# Altium PCB buck2.PcbDoc
Units mil, origin at the board's own origin, x right, y up, seen from the top; angles counter-clockwise.
Board outline 1968.5 x 787.4 mil, 2 copper layers (Top Layer, Bottom Layer); 20 components, 10 nets, 55 pads, 71 vias.
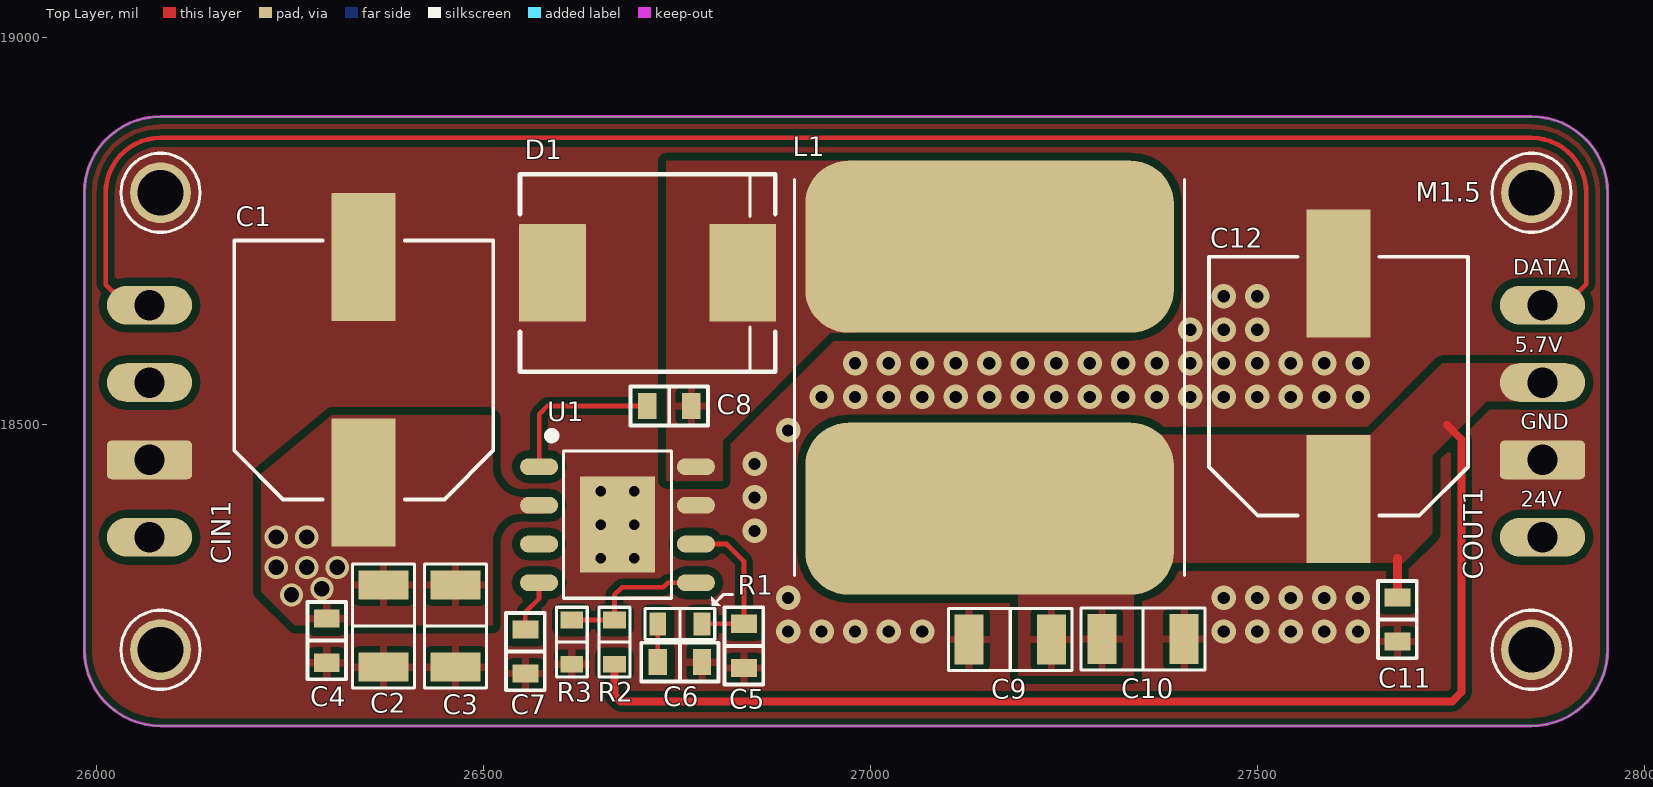
[diagram p0: Top Layer view]
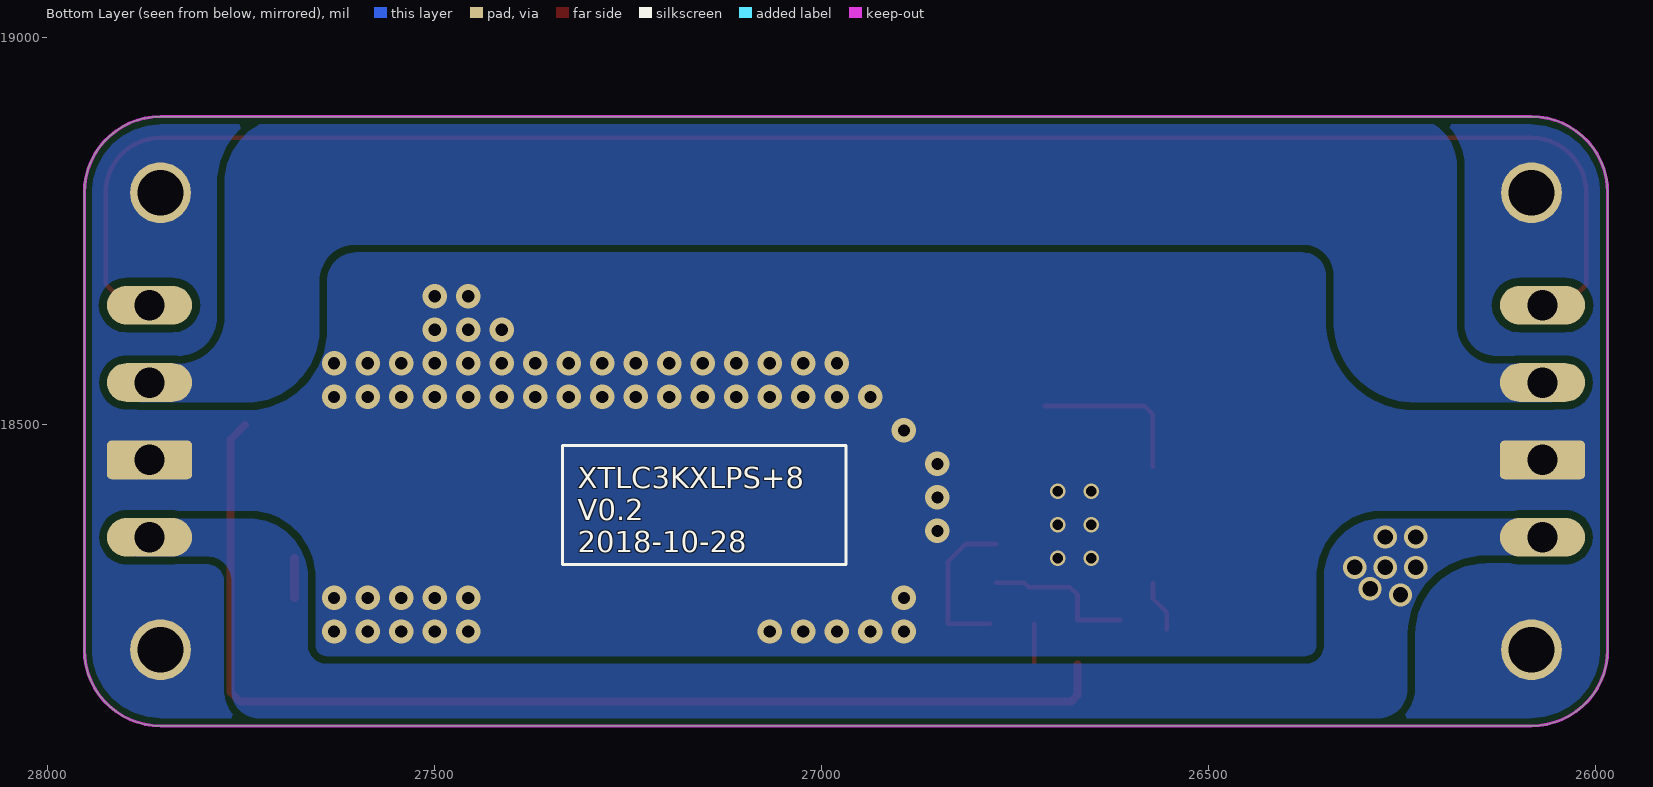
[diagram p1: Bottom Layer view, seen from below]
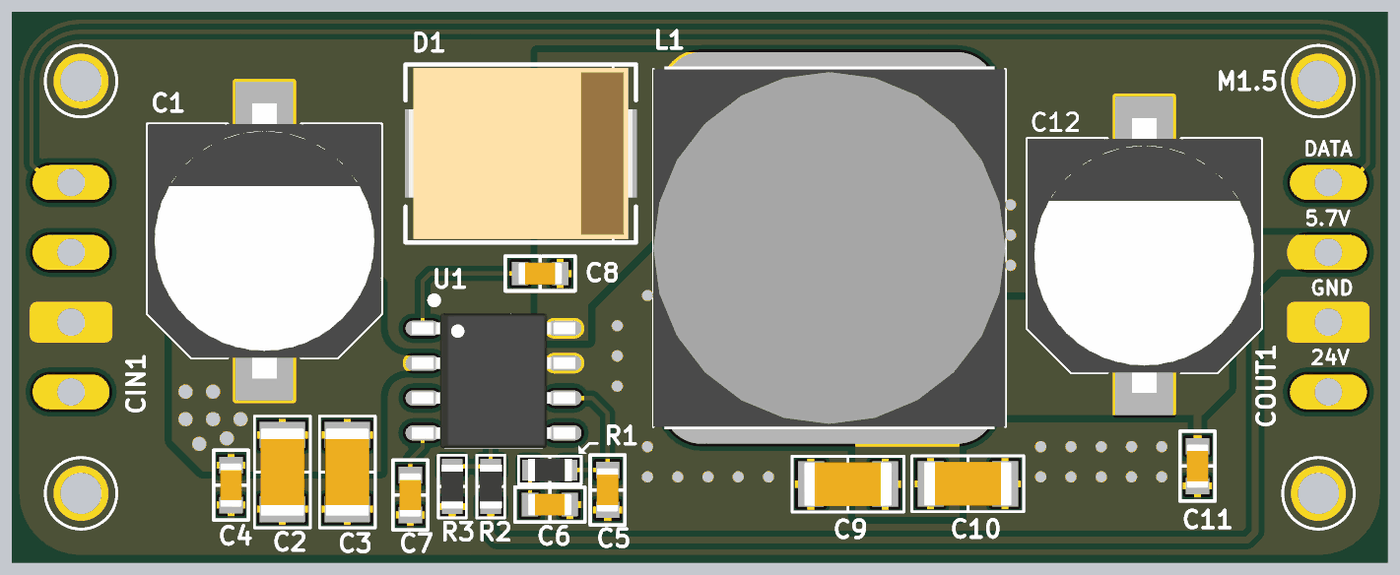
[diagram p2: 3D render of the assembled board from above, using the file's embedded part models]

## Layer stack, top to bottom
Top Solder: solder mask 0.4, Solder Resist, Dk 3.5
Top Layer: signal copper 1.4
Dielectric 1: dielectric 12.6, FR-4, Dk 4.8
Bottom Layer: signal copper 1.4
Bottom Solder: solder mask 0.4, Solder Resist, Dk 3.5

## Board outline
25984.26,18208.66 ccw(c26082.68,18208.66) 26082.69,18110.24 27854.34,18110.24 ccw(c27854.34,18208.66) 27952.76,18208.66 27952.76,18799.07 ccw(c27854.33,18799.21) 27854.33,18897.64 26082.69,18897.64 ccw(c26082.69,18799.21) 25984.26,18799.21

## Design rules (kind name [scope] priority, off if disabled: settings)
AssemblyTestPointUsage [All] p1: valid=2
Clearance [All vs InPadClass('Mounting')] p1: gap=10 except(1.97: THPad-Poly; 8: Arc-Poly Track-Poly)
Clearance Clearance_1 [All] p2: gap=10 except(8: Arc-Poly Track-Poly; 12: Via-Via)
ComponentClearance [All] p1: gap=0 collisioncheckmode=3 verticalgap=10 showdistances=FALSE
FabricationTestPointUsage [All] p1: valid=2 allowmultiple=FALSE
HoleSize [All] p1: absolutevalues=TRUE maxlimit=200 minlimit=1 maxpercent=80.000 minpercent=20.000
PlaneClearance [All] p1: clearance=8
PolygonConnect [All vs InPadClass('SpecialPad') OR (IsVia AND InNetClass('Power')) Or InPadClass('Mounting')] p1: connectstyle=Direct reliefconductorwidth=10 reliefentries=4 polygonreliefangle="90 Angle" airgapwidth=10
PolygonConnect PolygonConnect_1 [All] p2: connectstyle=Relief reliefconductorwidth=10 reliefentries=4 polygonreliefangle="90 Angle" airgapwidth=8
RoutingCorners [All] p1: cornerstyle=90-Degree minsetback=10 maxsetback=100
RoutingVias [All] p1: holewidth=28 width=25 viastyle="Through Hole" minholewidth=13.78 minwidth=13.78 maxholewidth=196.85 maxwidth=196.85
SMDNeckDown [All] p1: percent=50.000
SilkToSilkClearance [All] p1: silktosilkclearance=0
SilkToSolderMaskClearance [IsPad] p1: minsilkscreentomaskgap=0 clearancetoexposedcopper=TRUE
SolderMaskExpansion [All] p1: expansion=4
Width [All] p1: maxlimit=50 minlimit=6 preferedwidth=10
22 further rules are at their usual default settings.

## Classes and differential pairs
pad class Mounting: Free-1
component class Special: L1
pad class SpecialPad: C1-1 C1-2 C12-1 C12-2 CIN1-1 CIN1-2 CIN1-3 CIN1-4 COUT1-1 COUT1-2 COUT1-3 COUT1-4 D1-1 D1-2 L1-1 L1-2 U1-2 U1-7 U1-8 U1-9
net class Power: GND SW VIN VOUT

## Components (designator, comment, footprint, x,y, rotation, side; value= is the part's Value field where it differs from the comment)
C1 "Cap2" CAPAE10083X104N 26345.27,18570.24 r90 top
C2 "Cap" CAPC_1206_3216X16L 26370.96,18239.21 r90 top
C3 "Cap" CAPC_1206_3216X16L 26463.96,18239.21 r90 top
C4 "Cap" CAPC_0603_1608X08L 26297.51,18220.47 r90 top
C5 "Cap" CAPC_0603_1608X08L 26836.61,18213.58 r90 top
C6 "Cap" CAPC_0603_1608X08L 26753.94,18192.62 r180 top
C7 "Cap" CAPC_0603_1608X08L 26554.21,18206.35 r90 top
C8 "Cap" CAPC_0603_1608X08L 26740.16,18523.62 r180 top
C9 "Cap" CAPC_1206_3216X16L 27180.75,18221.89 r180 top
C10 "Cap" CAPC_1206_3216X16L 27352.36,18222.44 r0 top
C11 "Cap" CAPC_0603_1608X08L 27681.1,18247.71 r270 top
C12 "Cap2" CAPAE10083X104N 27604.87,18549.24 r90 top
CIN1 "CON2" CONNECTOR 26068.46,18503.94 r90 top
COUT1 "CON2" CONNECTOR 27868.53,18503.94 r90 top
D1 "D Schottky" CDBC-G 26712.27,18695.6 r180 top
L1 "Inductor" INDP130128X70N 27154.08,18560.24 r270 top
R1 "Res2" RESC_0603_1608X08L 26753.94,18242.13 r0 top
R2 "Res2" RESC_0603_1608X08L 26669.29,18218.5 r270 top
R3 "Res2" RESC_0603_1608X08L 26614.17,18218.5 r90 top
U1 "TPS54531" SOIC127P600X150_HS-9L 26673.26,18370.24 r0 top

## Footprints (in the part's own frame and the unit in brackets; to place one, negate y for a bottom-side part, rotate by r counter-clockwise, add the part's x,y. Pads: shape width x height; smd on the part's side, far side on the other; paste and mask are expansions set on the pad)
CAPAE10083X104N [mm] "Aluminum Electrolytic Capacitor, Body 8.30x8.30x10.40mm, IPC Medium Density"
  rrect1% 4.2x2.1 smd: 1(-3.7,0) 2(3.7,0)
  silkscreen extent -4.25,-4.25 4.25,4.25, body extent -5,-4.25 5,4.25, height 10.4
CAPC_0603_1608X08L [mm] "Chip Capacitor, 2-Leads, Body 1.60x0.80mm, IPC High Density"
  rrect1% 0.6x0.85 smd: 1(-0.725,0) 2(0.725,0)
  silkscreen extent -1.27,-0.64 1.27,0.64, body extent -0.8,-0.4 0.8,0.4, height 0.8
CAPC_1206_3216X16L [mm] "Chip Capacitor, 2-Leads, Body 3.20x1.60mm, IPC High Density"
  rrect1% 0.95x1.65 smd: 1(-1.35,0) 2(1.35,0)
  silkscreen extent -2.03,-1.02 2.03,1.02, body extent -1.6,-0.8 1.6,0.8, height 1.6
CDBC-G [mil]
  rrect1% 86x126 smd paste+0 mask+0: 1(123,0) 2(-123,0)
  silkscreen extent -165,-128 165,128, body extent -160,-123 160,123, height 105
CONNECTOR [mm]
  rrect100% 1.27x2.8 hole 1 paste+0: 1(-3.81,0) 3(1.27,0) 4(3.81,0)
  rrect25% 1.27x2.8 hole 1 paste+0: 2(-1.27,0)
INDP130128X70N [mm] "Precision Wire Wound Inductor, 2-Leads, Body 13.00x12.80mm, IPC Medium Density"
  rrect50% 5.65x12.1 smd: 1(-4.3,0) 2(4.3,0)
  silkscreen extent -6.5,-6.4 6.5,6.4, body extent -6.6,-6.4 6.6,6.4, height 7.1
RESC_0603_1608X08L [mm] "Chip Resistor, 2-Leads, Body 1.60x0.80mm, IPC High Density"
  rrect1% 0.55x0.75 smd: 1(-0.725,0) 2(0.725,0)
  silkscreen extent -1.14,-0.51 1.14,0.51, body extent -0.8,-0.4 0.8,0.4, height 0.8
SOIC127P600X150_HS-9L [mm] "SOIC, 8-Leads, Body 4.88x3.85mm, Pitch 1.27mm, Thermal Pad 3.15x2.45mm, IPC High Density"
  oval 1.25x0.55 smd: 1(-2.575,1.905) 2(-2.575,0.635) 3(-2.575,-0.635) 4(-2.575,-1.905) 5(2.575,-1.905) 6(2.575,-0.635) 7(2.575,0.635) 8(2.575,1.905)
  rect 2.45x3.15 smd: 9(0,0)
  silkscreen extent -2.28,-2.41 1.78,3.05, body extent -2.98,-2.45 2.98,2.45, height 1.5

## Part data
C1 C2 C3 C4 C5 C6 C7 C8 C9 C10 C11 C12: "Capacitor"
D1: "Schottky Diode"
R1 R2 R3: "Resistor"

## Free pads (board coordinates)
  round 78.74 hole 59.06 mask+0: 1(26082.68,18208.66) 1(26082.68,18799.21) 1(27854.33,18208.66) 1(27854.33,18799.21)

## Via types
v1: diameter 31.5, hole 15.75, Top Layer to Bottom Layer, tented both sides, 58 vias
v2: diameter 30, hole 20, Top Layer to Bottom Layer, tented both sides, 7 vias
v3: diameter 19.68, hole 13.78, Top Layer to Bottom Layer, tented both sides, 6 vias

## Nets (pads, with @x,y where several pads share a name; then routed paths per layer and width w, separated by ;. In a path a pad name is that pad's centre, name@x,y a point inside that pad or via, vN(x,y) a via of type N, cw(c..) or ccw(c..) an arc to the next point about the centre after c; other vN are vias at no path point)
DATA: CIN1.4 COUT1.4 | length 2366.7
  Top Layer w6: CIN1.4 26038.35,18653.94 26011.81,18680.47 26011.81,18799.07 cw(c26082.68,18799.21) 26082.68,18870.08 27854.33,18870.08 cw(c27854.33,18799.21) 27925.2,18799.21 27925.2,18681.1 27898.03,18653.94 COUT1.4
GND: C1.2 C2.1 C3.1 C4.1 C5.1 C6.1 C7.1 C9.2 C10.2 C11.2 C12.2 CIN1.2 COUT1.2 D1.1 pad.1 R3.1 U1.7 U1.9
  other v1: 26893.71,18232.29 26937.02,18232.29 26980.32,18232.29 27023.63,18232.29 27066.94,18232.29 27456.7,18232.29 27500.01,18232.29 27543.32,18232.29 27586.62,18232.29 27629.93,18232.29 26893.71,18275.6 27456.7,18275.6 27500.01,18275.6 27543.32,18275.6 27586.62,18275.6 27629.93,18275.6 26850.4,18362.21 26850.4,18405.52 26850.4,18448.82 26893.71,18492.13 26937.02,18535.44 26980.32,18535.44 27023.63,18535.44 27066.94,18535.44 27110.24,18535.44 27153.55,18535.44 27196.86,18535.44 27240.17,18535.44 27283.47,18535.44 27326.78,18535.44 27370.09,18535.44 27413.39,18535.44 27456.7,18535.44 27500.01,18535.44 27543.32,18535.44 27586.62,18535.44 27629.93,18535.44 26980.32,18578.75 27023.63,18578.75 27066.94,18578.75 27110.24,18578.75 27153.55,18578.75 27196.86,18578.75 27240.17,18578.75 27283.47,18578.75 27326.78,18578.75 27370.09,18578.75 27413.39,18578.75 27456.7,18578.75 27500.01,18578.75 27543.32,18578.75 27586.62,18578.75 27629.93,18578.75 27413.39,18622.05 27456.7,18622.05 27500.01,18622.05 27456.7,18665.36 27500.01,18665.36
  other v3: 26651.6,18326.93 26694.91,18326.93 26651.6,18370.24 26694.91,18370.24 26651.6,18413.54 26694.91,18413.54
NetC5_2: C5.2 R1.2 U1.6 | length 206.1
  Top Layer w6: U1.6 26814.21,18345.24 26836.61,18322.83 C5.2 R1.2
NetC6_2: C6.2 R1.1 | length 49.5
  Top Layer w6: C6.2 R1.1
NetC7_2: C7.2 U1.4 | length 67.7
  Top Layer w6: C7.2 26554.21,18257.24 26571.88,18274.9 U1.4
NetC8_2: C8.2 U1.1 | length 211.8
  Top Layer w6: U1.1 26571.89,18512.83 26582.68,18523.62 C8.2
NetR2_1: R2.1 R3.2 U1.5 | length 199.5
  Top Layer w6: R3.2 R2.1 26669.29,18279.53 26679.13,18289.37 26732.28,18289.37 26738.14,18295.23 U1.5
SW: C8.1 D1.2 L1.1 U1.8
VIN: C1.1 C2.2 C3.2 C4.2 CIN1.1 COUT1.1 U1.2
  other v2: 26251.97,18279.53 26291.34,18287.4 26232.28,18314.96 26271.65,18314.96 26311.02,18314.96 26232.28,18354.33 26271.65,18354.33
VOUT: C9.1 C10.1 C11.1 C12.1 CIN1.3 COUT1.3 L1.2 R2.2 | length 1546.9
  Top Layer w10: R2.2 26669.29,18149.61 26677.17,18141.73 27751.97,18141.73 27763.78,18153.54 27763.78,18480.67 27745.21,18499.24
  Top Layer w11.81: C11.1 27681.1,18326.77
pads on no net: U1.3

## Polygon pours and split planes (outlines as drawn)
VOUT on Bottom Layer "VOUT_L02_P000" (solid, pour order 0): 26056.21,18528.24 26232.95,18528.23 ccw(c26232.96,18633.49) 26338.21,18633.49 26338.21,18692.54 cw(c26377.9,18692.55) 26377.91,18732.24 27602.41,18732.24 cw(c27602.41,18685.44) 27649.21,18685.44 27649.21,18622.44 ccw(c27743.42,18622.44) 27743.42,18528.24 27881.21,18528.24 27881.21,18578.24 27831.21,18578.24 cw(c27831.21,18638.23) 27771.21,18638.23 27771.21,18811.46 ccw(c27685.04,18811.46) 27685.04,18897.64 26244.09,18897.64 ccw(c26244.09,18832.76) 26179.21,18832.76 26179.21,18628.04 cw(c26129.44,18628.04) 26129.46,18578.27 26056.21,18578.24
VIN on Bottom Layer "VIN_L02_P001" (solid, pour order 1): 26350.39,18303.11 26350.39,18214.16 ccw(c26374.31,18214.16) 26374.32,18190.24 27640.28,18190.24 ccw(c27640.28,18214.16) 27664.21,18214.16 27664.21,18302.01 cw(c27740.43,18302.01) 27740.43,18378.23 27886.21,18378.23 27886.21,18329.23 27793.8,18329.23 ccw(c27793.8,18297.65) 27762.21,18297.64 27762.21,18155.91 cw(c27726.4,18155.91) 27726.39,18120.09 26281.48,18120.09 cw(c26281.48,18158.36) 26243.21,18158.36 26243.21,18229.23 ccw(c26141.73,18229.23) 26141.73,18330.71 26070.87,18330.71 26070.87,18378.23 26275.56,18378.02 cw(c26275.48,18303.11)
GND on Bottom Layer "GND_L02_P008" (solid, remove dead copper, pour order 8): 25984.25,18898.62 27952.68,18898.62 27952.68,18110.24 25984.25,18110.24
VIN on Top Layer "VIN_L01_P006" (solid, remove dead copper, pour order 6): 26212.6,18435.91 26304.05,18511.81 26511.81,18511.81 26511.81,18445.12 ccw(c26551.02,18445.12) 26551.03,18405.91 26582.68,18405.91 26582.68,18384.65 26549.37,18384.65 ccw(c26549.37,18347.09) 26511.81,18347.09 26511.81,18240.16 26256.29,18240.16 26212.6,18283.85
VOUT on Top Layer "VOUT_L01_P004" (solid, remove dead copper, pour order 4): 27874.21,18529.53 27874.21,18578.74 27738.72,18578.74 27646.2,18486.22 27190.94,18486.22 27190.94,18175.2 27340.55,18175.2 27340.55,18320.87 27688.98,18320.87 27726.38,18358.27 27726.38,18459.45 27796.45,18529.53
GND on Top Layer "GND_L01_P010" (solid, remove dead copper, pour order 10): 25984.25,18897.64 27952.76,18897.64 27952.76,18110.24 25984.25,18110.24
SW on Top Layer "SW_L01_P002" (solid, remove dead copper, pour order 2): 26736.22,18427.17 26809.06,18427.17 26809.06,18478.74 26948.42,18618.11 26980.31,18618.11 26980.31,18840.55 26736.22,18840.55

## Keep-outs
Keep-Out Layer:
  lines w3.94: 25984.25,18208.67 25984.25,18799.21 ; 26082.68,18110.24 27854.34,18110.24 ; 26082.68,18897.64 27852.76,18897.64 ; 27952.76,18208.66 27952.76,18797.64
  lines w4: 25984.26,18208.66 ccw(c26082.68,18208.66) 26082.68,18110.24 ; 25984.26,18799.21 cw(c26082.68,18799.21) 26082.68,18897.64 ; 27854.34,18110.24 ccw(c27854.34,18208.66) 27952.76,18208.66 ; 27854.33,18897.64 cw(c27854.33,18799.21) 27952.76,18799.21

## Silkscreen, mask and mechanical layers (free items; w line width, h text height)
Top Overlay:
  circle w4: c26082.68,18208.66 r51.18
  circle w4: c26082.68,18799.21 r51.18
  circle w4: c27854.33,18208.66 r51.18
  circle w4: c27854.33,18799.21 r51.18
  region: 26795.28,18265.42 26806.76,18265.42 26794.62,18277.56
  lines w4: 26797.94,18267.72 26810.5,18280.27 26821.65,18280.27
  text "M1.5" at 27704.72,18787.4 h25
  text "DATA" at 27830.71,18692.91 h20
  text "5.7V" at 27832.37,18593.18 h20
  text "GND" at 27840.71,18493.44 h20
  text "24V" at 27840.71,18393.7 h20
Bottom Overlay:
  lines w4: 26968.5,18318.9 26968.5,18472.44 27334.65,18472.44 27334.65,18318.9 26968.5,18318.9
  text "XTLC3KXLPS+8 / V0.2 / 2018-10-28" at 27314.96,18334.65 h27.56
Mechanical 1:
  the board outline again, w4

## Dimensions
25984.25,18799.2 to 27952.76,18799.21 on Mechanical 2
26082.69,18897.64 to 26082.69,18110.24 on Mechanical 2
26082.68,18799.21 to 26082.69,18897.64 on Mechanical 2
26082.68,18799.21 to 25984.25,18799.2 on Mechanical 2